# Altium PCB PCB1.PcbDoc (part 3 of 7)
Units mm, origin at the board's own origin, x right, y up, seen from the top; angles counter-clockwise.
Board outline 100 x 70 mm, 6 copper layers (Top Layer 1, GND_1, SIG, VCC, GND_2, Bottom Layer 1), stack 0.816 mm thick; 462 components, 328 nets, 2208 pads, 873 vias.
Unrouted connection lines stored in the file: 176.
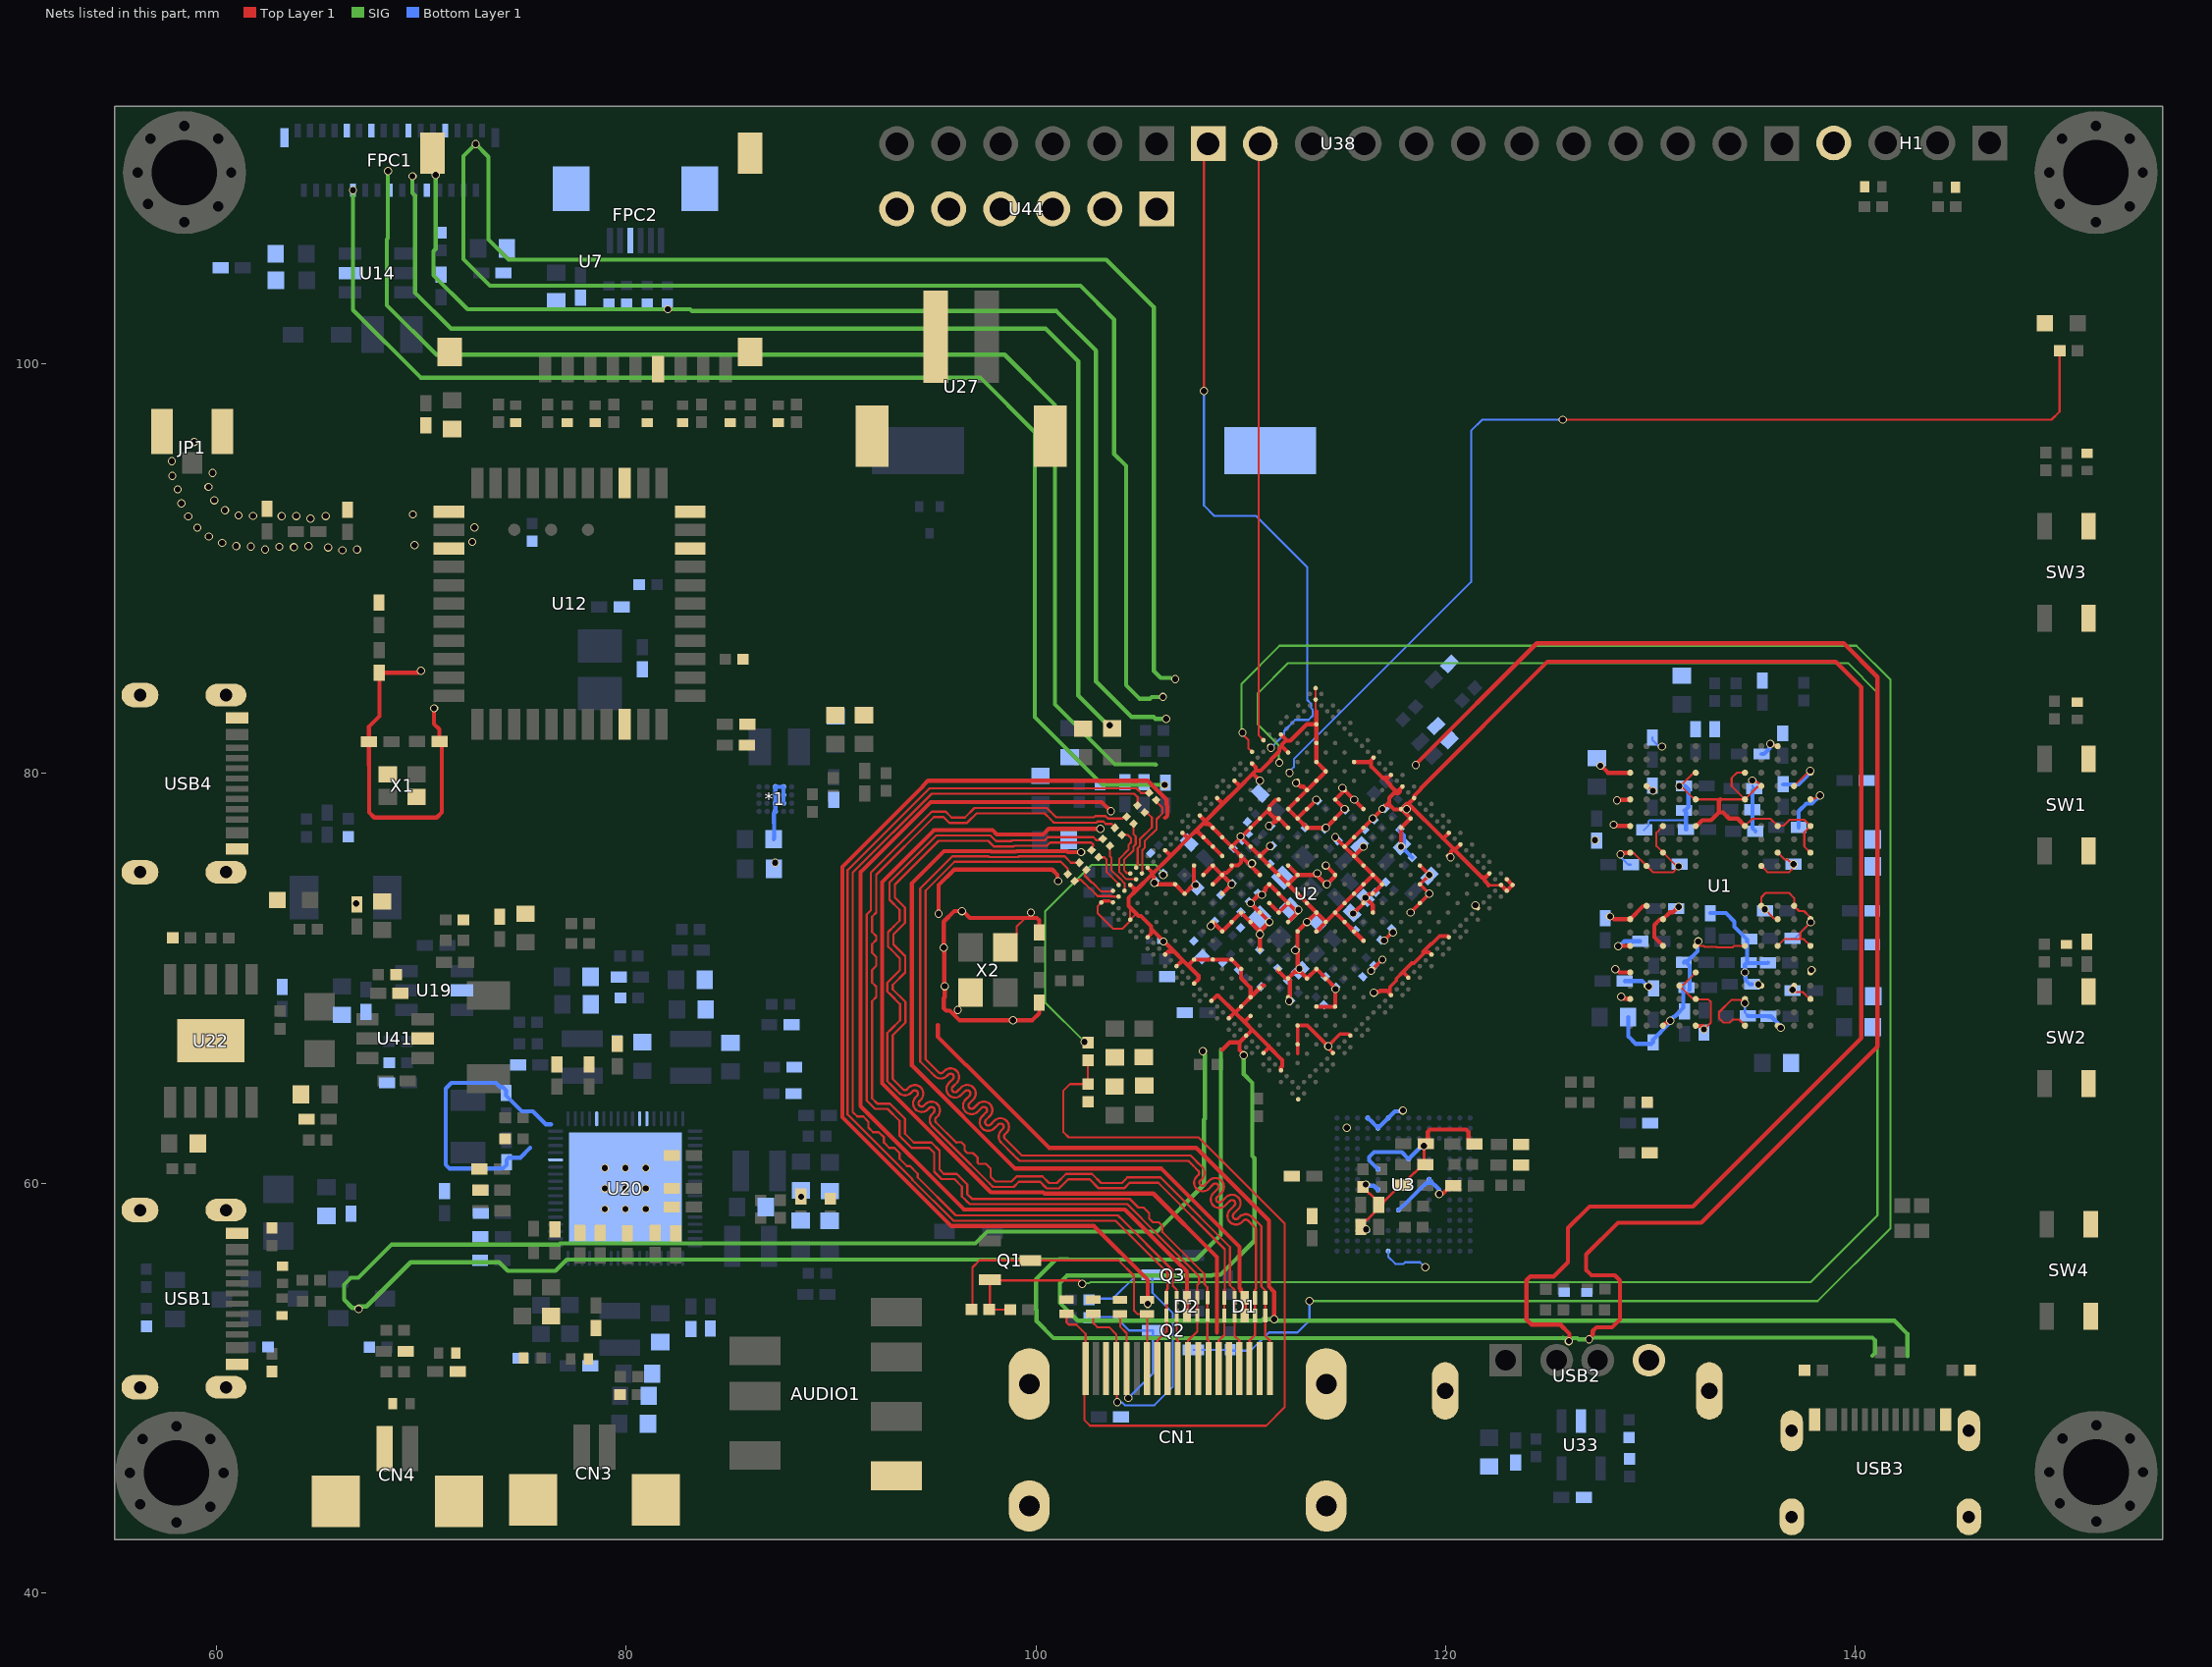
[diagram p7: the nets of this part, all layers, seen from the top]

## Via types
v1: diameter 0.4, hole 0.3, Top Layer 1 to Bottom Layer 1, tented both sides, 873 vias

## Nets (pads, with @x,y where several pads share a name; then routed paths per layer and width w, separated by ;. In a path a pad name is that pad's centre, name@x,y a point inside that pad or via, vN(x,y) a via of type N, cw(c..) or ccw(c..) an arc to the next point about the centre after c; other vN are vias at no path point) (continued)
GND: *1.B2 *1.B3 *1.B4 *1.C1 *1.C2 *1.C3 *1.C4 AUDIO1.1 BT1.2 C1.1 C2.1 C3.1 C4.1 C5.1 C6.1 C7.1 C8.1 C9.1 C10.1 C11.1 C12.1 C13.1 C14.1 C15.1 C16.1 C17.1 C18.1 C19.1 C20.1 C21.1 C22.1 C23.1 C24.1 C25.1 C26.1 C27.1 C28.1 C29.1 C30.1 C31.1 C32.1 C33.1 C34.1 C35.1 C36.1 C37.1 C38.1 C39.1 C40.1 C41.1 C42.1 C43.2 C44.2 C46.1 C47.1 C48.2 C49.1 C50.1 C51.1 C52.1 C53.1 C54.1 C55.1 C56.1 C57.1 C58.1 C59.1 C60.1 C61.1 C62.1 C65.1 C66.1 C67.1 C68.1 C69.1 C70.2 C71.2 C72.2 C74.2 C75.2 C76.2 C77.2 C78.1 C79.1 C80.1 C82.1 C83.2 C84.1 C85.1 C86.2 C87.1 C88.1 C90.2 C91.2 C92.1 C93.1 C94.2 C95.2 C96.2 C97.2 C98.1 C99.2 C100.1 C101.1 C102.2 C103.1 C104.1 C105.1 C106.1 C107.2 C108.2 C110.2 C111.2 C112.1 C113.1 C114.1 C115.1 C117.1 C118.1 C119.1 C120.1 C121.1 C122.1 C124.1 C125.1 C126.1 C127.1 C128.1 C129.1 C130.1 C131.1 C132.1 C133.1 C134.1 C135.1 C136.1 C137.1 C138.1 C139.1 C140.1 C141.1 C142.1 C143.1 C144.1 C145.1 C146.1 C147.1 C148.1 C149.1 C150.1 C151.1 C152.1 C153.1 C154.1 C155.1 C156.1 C157.1 C158.1 C159.1 C160.1 C161.1 C162.1 C163.1 C164.1 C165.1 C166.1 C167.1 C168.1 C169.1 C170.1 C171.1 C172.1 C173.2 C174.1 C179.1 C180.1 C181.1 C182.1 C183.1 C184.1 C185.1 C186.1 C187.1 C188.1 C189.1 C190.1 C191.1 C192.1 C193.1 C194.1 C195.1 C196.2 C197.2 C198.2 C199.2 C200.2 C201.2 C202.1 C203.1 C204.1 C205.1 C206.1 C207.1 C208.1 C209.1 C210.1 C211.1 C212.1 C213.1 C214.1 C215.1 C216.1 C217.1 C218.1 C219.1 C220.1 C221.1 C222.1 C223.1 C224.1 C225.1 C226.1 C227.1 C228.1 C229.1 C230.1 C231.1 C233.1 C234.1 C235.2 C236.2 C237.2 C238.2 C239.1 C242.1 C243.1 C244.1 C245.1 C246.1 C247.1 C248.2 C249.2 C250.1 C251.1 C252.1 C253.1 CN1.2 CN1.5 CN1.8 CN1.11 CN1.17 CN1.20 CN1.21 CN1.22 CN1.23 CN3.3 CN3.4 CN4.1 CN4.3 CN4.4 D1.3 D1.8 D2.3 D2.8 D3.2 D4.2 D5.2 D6.2 FPC1.9 FPC1.10 FPC1.13 FPC1.16 FPC1.19 FPC1.22 FPC1.25 FPC1.32 FPC2.3 FPC2.7 FPC2.8 H1.4 JP1.2 JP1.3 LED1.1 LED3.1 R11.2 R12.2 R13.2 R14.1 R30.1 R31.1 R32.1 R33.1 R38.1 R42.1 R43.1 R50.2 R53.1 R55.1 R66.2 R69.2 R72.1 R73.1 R74.1 R78.1 R82.1 R83.1 R84.2 R85.1 R89.1 R94.2 R112.1 R113.1 R116.1 R118.1 SW1.3 SW1.4 SW2.3 SW2.4 SW3.3 SW3.4 SW4.3 SW4.4 U1.A3 U1.A10 U1.AB3 U1.AB5 U1.AB8 U1.AB10 U1.C1 U1.C5 U1.C8 U1.C12 U1.D2 U1.D4 U1.D9 U1.D11 U1.E1 U1.E5 U1.E8 U1.E12 U1.G1 U1.G3 U1.G5 U1.G8 U1.G10 U1.G12 U1.J1 U1.J3 U1.J10 U1.J12 U1.K2 U1.K4 U1.K9 U1.K11 U1.N2 U1.N4 U1.N9 U1.N11 U1.P1 U1.P3 U1.P10 U1.P12 U1.T1 U1.T3 U1.T5 U1.T8 U1.T10 U1.T12 U1.V1 U1.V5 U1.V8 U1.V12 U1.W2 U1.W4 U1.W9 U1.W11 U1.Y1 U1.Y5 U1.Y8 U1.Y12 U2.1B10 U2.1B11 U2.1B15 U2.1B19 U2.1C4 U2.1C5 U2.1C6 U2.1C8 U2.1C9 U2.1C14 U2.1C16 U2.1C18 U2.1D1 U2.1D3 U2.1D4 U2.1D10 U2.1D14 U2.1E3 U2.1E8 U2.1E10 U2.1E14 U2.1E15 U2.1E17 U2.1F6 U2.1F7 U2.1F8 U2.1F9 U2.1F10 U2.1F15 U2.1F16 U2.1F20 U2.1G3 U2.1G6 U2.1G7 U2.1G8 U2.1G9 U2.1G10 U2.1G11 U2.1G12 U2.1G14 U2.1G16 U2.1G18 U2.1G19 U2.1G20 U2.1H1 U2.1H2 U2.1H6 U2.1H11 U2.1H12 U2.1H13 U2.1J1 U2.1J5 U2.1J6 U2.1J8 U2.1J9 U2.1J11 U2.1J12 U2.1J13 U2.1J16 U2.1J18 U2.1K2 U2.1K3 U2.1K4 U2.1K5 U2.1K6 U2.1K8 U2.1K9 U2.1K11 U2.1K12 U2.1K13 U2.1K14 U2.1K15 U2.1K18 U2.1L3 U2.1L6 U2.1L10 U2.1L11 U2.1L12 U2.1L13 U2.1L14 U2.1L15 U2.1L19 U2.1M3 U2.1M4 U2.1M5 U2.1M6 U2.1M10 U2.1M11 U2.1M12 U2.1M13 U2.1M14 U2.1M15 U2.1M16 U2.1M17 U2.1M20 U2.1N3 U2.1N4 U2.1N7 U2.1N11 U2.1N12 U2.1N17 U2.1P1 U2.1P5 U2.1P6 U2.1P7 U2.1P8 U2.1P10 U2.1P11 U2.1P12 U2.1P14 U2.1P15 U2.1R3 U2.1R4 U2.1R5 U2.1R6 U2.1R7 U2.1R8 U2.1R9 U2.1R11 U2.1R12 U2.1R13 U2.1R14 U2.1R15 U2.1T3 U2.1T5 U2.1T7 U2.1T8 U2.1T9 U2.1T10 U2.1T11 U2.1T12 U2.1T13 U2.1T14 U2.1T15 U2.1T16 U2.1T17 U2.1U2 U2.1U12 U2.1U13 U2.1U15 U2.1U17 U2.1V1 U2.1V4 U2.1V7 U2.1V12 U2.1V13 U2.1V18 U2.A1 U2.A2 U2.A38 U2.AA2 U2.AC37 U2.AD2 U2.AE37 U2.AH37 U2.AL37 U2.AP2 U2.AP8 U2.AP13 U2.AP16 U2.AP19 U2.AP22 U2.AP25 U2.AP28 U2.AP31 U2.AP34 U2.AP37 U2.AR1 U2.AR38 U2.B1 U2.B2 U2.B6 U2.B11 U2.B14 U2.B18 U2.B21 U2.B28 U2.B31 U2.D2 U2.E37 U2.H37 U2.J2 U2.L2 U2.L37 U2.P37 U2.U2 U2.U37 U2.W2 U2.Y37 U3.A6 U3.C4 U3.E7 U3.G5 U3.H10 U3.J5 U3.K8 U3.N2 U3.N5 U3.P4 U3.P6 U4.2 U5.2 U6.2 U7.6 U7.10 U7.11 U7.12 U7.13 U8.1 U9.1 U10.1 U11.1 U12.1 U12.3 U12.20 U12.31 U12.33 U12.36 U14.2 U15.1 U16.1 U17.1 U18.1 U19.2 U20.47 U20.56 U20.62 U20.63 U20.69 U22.11 U23.1 U24.1 U25.1 U26.1 U27.1 U27.3 U27.4 U29.1 U30.1 U31.2 U32.1 U33.2 U35.1 U36.1 U37.1 U41.2 U42.1 U43.1 U44.1 U44.2 U44.3 U44.4 U44.5 U44.6 USB1.1 USB1.12 USB1.13 USB1.14 USB2.4 USB2.5 USB2.6 USB3.1 USB3.12 USB3.13 USB3.14 USB4.1 USB4.12 USB4.13 USB4.14 X1.2 X1.4 X2.2 X2.4 | length 1267.7
  Top Layer 1 w0.102: v1(96.187,68.455) 96.187,68.536 96.264,68.613 96.264,68.756 X2.2@96.814,69.305 ; X2.4@98.514,71.505 99.063,72.054 99.063,72.52 99.497,72.954 ; U2.AR38@103.195,73.707 103.218,73.73 103.307,73.73 103.314,73.737 103.699,73.737 103.729,73.707 U2.AP37@103.761,73.707 ; 103.649,73.737 103.576,73.81 103.284,73.81 103.211,73.737 103.211,73.717 103.013,73.519 103.013,73.186 103.777,72.421 104.233,72.421 104.589,72.777 104.589,73.449 104.505,73.533 ; U2.AL37@104.61,72.858 104.61,72.86 104.902,73.152 ; U2.AR1@113.664,84.17 113.664,83.065 113.699,83.03 ; 122.103,74.524 122.119,74.54 122.701,74.54 U2.B2@122.715,74.554 ; U1.J1@129.018,76.132 129.051,76.099 129.212,76.099 U1.K2@129.824,75.487 130.127,75.184 131.121,75.184 U1.K4@131.424,75.487 ; U1.D2@129.824,79.387 129.863,79.387 130.094,79.156 v1(130.133,79.156) ; U1.G3@130.624,77.437 130.302,77.115 130.302,76.458 131.236,75.525 131.386,75.525 U1.K4@131.424,75.487 ; v1(131.385,75.465) 131.402,75.465 U1.K4@131.424,75.487 ; v1(131.424,79.387) U1.D4@131.463,79.387 ; U1.V5@132.224,70.287 132.224,70.275 131.617,69.668 131.455,69.668 U1.W4@131.424,69.637 131.762,69.298 131.773,69.298 132.047,69.025 132.186,69.025 U1.Y5@132.224,68.987 132.249,68.961 132.842,68.961 132.955,68.848 132.955,67.837 132.722,67.604 132.65,67.604 v1@132.634,67.62 ; U1.T5@132.224,71.587 U1.T5@132.348,71.587 ; U1.C5@132.224,80.037 132.186,79.999 132.075,79.999 U1.D4@131.463,79.387 ; v1(132.348,71.803) U1.T5@132.348,71.587 ; v1(134.623,68.788) 134.559,68.788 134.396,68.952 133.971,68.952 133.362,68.343 133.362,68.051 133.568,67.844 133.887,67.844 134.023,67.98 134.346,67.98 134.624,67.702 U1.AB8@134.624,67.687 ; U1.Y8@134.624,68.987 134.64,68.97 v1@134.64,68.819 ; U1.T8@134.624,71.587 134.095,71.587 134.025,71.516 133.241,71.516 133.231,71.526 132.665,71.526 132.605,71.587 U1.T5@132.348,71.587 ; U1.G8@134.624,77.437 134.968,77.781 135.879,77.781 U1.G10@136.224,77.437 136.246,77.459 136.526,77.459 136.806,77.739 137.521,77.739 U1.G12@137.824,77.437 137.521,77.134 137.521,76.439 U1.J12@137.824,76.137 ; U1.C8@134.624,80.037 134.228,80.037 133.978,79.786 133.978,79.383 U1.E8@134.624,78.737 ; v1(134.985,79.657) 135.042,79.6 135.211,79.6 U1.D9@135.424,79.387 135.386,79.349 135.236,79.349 U1.E8@134.624,78.737 ; U1.K9@135.424,75.487 135.726,75.184 136.779,75.184 136.906,75.311 136.906,75.316 136.991,75.4 v1(136.991,75.572) ; v1@135.596,73.454 135.509,73.454 U1.N9@135.426,73.537 ; v1(135.863,81.443) 135.943,81.443 136.012,81.375 136.186,81.375 U1.A10@136.224,81.337 ; U1.T10@136.224,71.587 136.549,71.912 137.33,71.912 ; U1.P10@136.224,72.887 136.186,72.925 136.044,72.925 135.602,73.367 135.595,73.367 U1.N9@135.426,73.537 ; U1.J10@136.224,76.137 136.562,75.798 136.712,75.798 U1.K11@136.965,75.546 ; v1(136.948,69.432) 137.045,69.334 137.44,69.334 137.787,68.987 U1.Y12@137.824,68.987 ; v1@136.961,69.398 136.987,69.425 136.987,69.566 137.024,69.603 U1.W11@137.024,69.637 ; U1.D11@137.024,79.387 137.636,79.999 137.732,79.999 137.746,80.012 137.746,80.037 U1.C12@137.824,80.037 ; U1.C12@137.782,80.037 137.807,80.062 v1(137.807,80.135) ; U1.P12@137.799,72.826 137.807,72.826 137.838,72.795 v1(137.838,72.734) 137.33,72.226 137.33,71.912 ; U1.V12@137.824,70.287 137.824,70.34 137.876,70.393 v1(137.876,70.409) ; U1.T12@137.824,71.587 137.499,71.912 137.33,71.912 ; U1.P12@137.824,72.887 137.786,72.925 137.786,73.01 137.511,73.285 137.275,73.285 U1.N11@137.024,73.537 137.024,73.923 136.779,74.168 135.636,74.168 135.424,73.956 U1.N9@135.424,73.537 U1.N9@135.426,73.537 ; U1.E12@137.824,78.737 137.862,78.775 138.057,78.775 138.207,78.925 v1(138.287,78.925) ; U1.D4@131.463,79.387 131.477,79.387 131.55,79.314 131.575,79.314 132.076,78.813 132.094,78.813 132.17,78.737 U1.E5@132.224,78.737 133.424,78.737 U1.E8@134.624,78.737
  Top Layer 1 w0.127: C166.1@115.86,57.847 115.86,57.972 116.066,58.178 116.146,58.178 116.97,59.002 C160.1@116.97,59.069 ; R66.2@115.968,59.808 115.968,59.795 116.271,59.492 116.302,59.492 116.519,59.276 116.763,59.276 C160.1@116.97,59.069 ; R66.2@115.978,59.797 v1(116.11,59.929) ; C161.1@119.016,61.812 118.956,61.751 118.956,60.96 C163.1@119.016,60.899 118.956,60.899 118.891,60.899 118.496,60.503 118.478,60.503 118.264,60.29 118.264,60.098 118.058,59.891 C165.1@117.933,59.891 117.726,59.685 117.585,59.685 C160.1@116.97,59.069
  Top Layer 1 w0.178: 112.78,66.316 112.78,67.695 112.782,67.697 113.254,67.697 v1(114.278,66.673) ; U2.B31@114.513,66.351 114.513,66.361 114.32,66.553 114.32,66.631 v1(114.278,66.673) ; U2.B28@115.358,67.202 115.346,67.202 115.273,67.275 114.845,67.275 114.278,66.708 v1(114.278,66.673) ; v1(116.371,70.36) 116.371,70.366 116.454,70.448 U2.1B11@116.454,70.454 116.911,70.912 v1(116.917,70.912) ; U2.1C9@116.913,71.833 116.921,71.841 117,71.841 v1(117.002,71.844) ; v1@117.02,71.861 117.365,72.206 117.365,72.273 U2.1C8@117.373,72.273 ; 117.255,69.278 117.293,69.316 117.293,69.582 117.608,69.897 117.608,69.991 117.923,70.306 ; U2.1C8@117.373,72.215 U2.1C8@117.373,72.293 117.383,72.293 v1(117.441,72.235) ; U2.B18@118.189,70.028 118.189,70.04 117.923,70.306 ; v1(118.296,73.21) v1(119.215,74.129) U2.1C4@119.211,74.131 118.755,74.589 v1(119.215,75.049) U2.1E3@118.755,75.508 ; 118.909,71.266 119.202,71.266 119.308,71.159 U2.B14@119.321,71.159 ; U2.B11@120.166,72.01 120.155,72.01 120.108,72.057 119.715,72.057 119.333,71.674 119.291,71.674 118.909,71.292 118.909,71.186 118.469,70.746 118.363,70.746 117.923,70.306
  Top Layer 1 w0.203: v1(69.967,85.022) 69.913,85.022 69.815,84.924 C46.1@67.928,84.924 67.945,84.907 67.945,82.804 67.435,82.294 C48.2@67.435,81.555 67.435,80.393 67.437,80.391 67.437,78.105 67.691,77.851 70.739,77.851 70.993,78.105 70.993,81.449 C51.1@70.872,81.57 70.872,82.163 70.612,82.423 v1(70.612,83.185) ; 95.208,67.72 95.208,67.143 96.567,65.784 96.584,65.784 100.645,61.722 107.823,61.722 111.379,58.166 111.379,54.941 111.633,54.687 v1(111.633,53.349) ; v1(95.25,73.152) 95.25,74.549 96.012,75.311 100.796,75.311 101.054,75.053 101.054,74.787 v1(101.092,74.749) ; 95.993,68.227 96.187,68.422 v1(96.187,68.455) ; v1(98.885,67.945) 96.275,67.945 95.798,68.422 95.623,68.422 95.504,68.541 95.504,69.024 95.554,69.074 v1(95.554,69.61) 95.529,69.635 95.529,71.476 v1(95.504,71.501) 95.504,72.771 96.012,73.279 96.446,73.279 96.771,72.954 99.497,72.954 100.045,72.954 100.164,72.835 C62.1@100.164,72.247 ; v1@98.885,67.954 99.831,67.954 100.164,68.287 C61.1@100.164,68.819 ; 99.754,72.954 v1(99.754,73.211) ; v1(102.207,76.158) 101.567,76.158 101.513,76.211 99.055,76.211 99.027,76.183 97.834,76.183 97.806,76.211 95.515,76.211 93.946,74.642 93.946,65.742 98.982,60.706 106.125,60.706 109.946,56.886 109.946,54.874 110.005,54.815 110.005,54.728 110.201,54.531 D1.3@110.201,53.533 ; v1(103.148,77.298) 100.626,77.298 100.357,77.029 98.088,77.029 97.884,77.232 95.027,77.232 92.487,74.693 92.487,64.869 97.805,59.552 100.358,59.552 100.427,59.483 101.238,59.483 101.243,59.488 105.739,59.488 108.839,56.388 108.839,52.705 ; v1(103.663,78.16) 103.212,78.611 94.867,78.611 91.44,75.184 91.44,63.754 96.489,58.705 104.347,58.705 107.378,55.673 D2.3@107.378,53.541 ; U2.AP34@104.613,74.554 104.617,74.554 104.872,74.299 104.898,74.299 ; v1(105.458,54.101) 105.458,54.261 D6.2@105.419,54.3 105.462,54.343 105.462,55.273 102.834,57.901 95.872,57.901 90.551,63.221 90.551,75.437 94.479,79.365 94.479,79.397 94.729,79.647 105.46,79.647 106.382,78.725 106.382,78.487 106.425,78.444 106.425,77.942 106.318,77.834 ; U2.AH37@105.458,72.01 105.458,72.014 105.632,72.189 105.632,72.422 ; U2.AP31@105.462,75.402 105.462,75.398 105.66,75.199 105.66,75.061 ; v1@106.232,71.785 106.269,71.785 106.743,71.31 ; v1(106.232,71.8) 106.232,71.822 105.632,72.422 ; U2.AE37@106.31,71.16 106.315,71.16 106.465,71.31 106.743,71.31 ; U2.AP28@106.31,76.251 106.312,76.251 106.581,75.982 ; U2.AC37@106.876,70.594 106.88,70.594 107.152,70.866 107.188,70.866 ; U2.AP25@107.159,77.099 107.163,77.099 107.36,76.903 107.501,76.903 ; 107.392,70.675 107.941,70.126 107.941,69.958 107.739,69.756 107.734,69.756 U2.Y37@107.724,69.746 ; U2.1U15@107.721,75.51 107.721,74.592 U2.1T16@107.724,74.589 ; v1(107.797,74.553) 107.761,74.589 U2.1T16@107.724,74.589 ; U2.AP22@108.007,77.948 108.007,77.943 108.275,77.676 ; U2.1T15@108.184,75.049 108.184,75.054 108.638,75.508 108.643,75.508 108.643,75.502 108.748,75.398 108.748,75.394 109.088,75.054 109.098,75.054 109.1,75.051 U2.1R14@109.103,75.049 ; v1(108.538,72.557) 108.576,72.594 108.576,72.684 108.64,72.748 U2.1N17@108.64,72.752 109.101,72.291 109.103,72.291 110.022,73.21 U2.1K15@110.941,72.291 ; U2.U37@108.573,68.897 108.577,68.897 108.838,69.158 108.896,69.158 109.716,68.338 ; U2.1R15@108.643,74.589 U2.1R14@109.103,75.049 ; U2.AP19@108.856,78.796 108.856,78.792 109.095,78.553 109.095,78.496 ; 109.093,66.499 109.468,66.874 109.944,66.874 ; U2.1P15@109.103,74.129 v1(109.563,74.589) 109.56,74.592 U2.1R14@109.103,75.049 ; U2.1R14@109.103,75.049 109.212,75.158 109.318,75.158 109.556,75.396 109.556,75.502 U2.1R13@109.561,75.507 ; U2.1T13@109.103,75.968 107.914,77.157 107.755,77.157 ; U2.P37@109.421,68.048 109.426,68.048 109.704,68.326 ; U2.1R13@109.559,75.51 109.872,75.51 110.019,75.657 U2.1R12@110.019,75.97 ; U2.AP16@109.704,79.645 109.704,79.64 109.914,79.43 109.914,79.316 ; 109.728,68.326 110.172,67.882 ; 109.735,68.326 110.942,69.533 110.946,69.533 111.066,69.653 111.123,69.653 111.133,69.663 ; v1(110.153,66.24) 110.153,66.293 109.944,66.503 109.944,66.874 ; U2.1F20@110.478,68.154 110.205,67.882 110.172,67.882 ; U2.1P12@110.477,75.516 110.474,75.516 110.022,75.968 U2.1T12@109.563,76.427 ; U2.1G19@110.479,69.075 110.479,69.552 110.019,70.011 110.019,70.449 110.022,70.452 109.563,70.912 107.72,70.912 107.483,70.675 107.379,70.675 107.188,70.866 ; v1(110.549,75.612) 110.539,75.603 110.539,75.575 110.478,75.515 U2.1P12@110.478,75.51 U2.1N12@110.94,75.049 ; U2.AP13@110.553,80.493 110.553,80.489 110.74,80.302 110.74,80.141 ; U2.1J16@110.938,71.373 110.942,71.377 110.938,71.38 110.938,72.288 v1(111.401,72.751) v1(110.482,73.67) 110.482,73.675 U2.1M13@110.938,74.131 110.943,74.131 110.999,74.075 v1(111.031,74.075) ; v1(110.942,79.645) 110.636,79.951 110.549,79.951 ; v1@111.034,74.077 111.034,74.131 111.208,74.304 111.208,74.396 111.4,74.589 U2.1K12@112.32,73.67 ; U2.H37@111.118,66.351 111.118,66.356 111.379,66.616 111.379,66.675 110.617,67.437 ; 111.379,66.658 112.033,66.004 112.033,65.697 111.967,65.63 111.967,65.512 U2.E37@111.962,65.508 ; v1(111.384,77.44) 111.384,77.362 U2.1R9@111.398,77.349 ; U2.1L13@111.401,73.67 111.861,73.21 U2.1K12@112.32,73.67 ; U2.1P10@111.401,76.428 U2.1P11@110.941,75.968 ; U2.1T8@111.401,78.266 U2.1T11@110.022,76.887 ; v1@111.473,77.44 111.473,77.475 111.654,77.656 111.71,77.656 111.854,77.8 U2.1R8@111.86,77.806 ; U2.1G16@111.816,70.374 111.816,70.413 U2.1G16@111.857,70.454 ; U2.1G16@111.84,70.35 112.192,69.998 112.315,69.998 U2.1F16@112.318,69.995 ; U2.1T7@111.859,78.724 111.731,78.724 111.401,78.395 111.401,78.266 111.401,78.068 111.641,77.828 111.833,77.828 111.855,77.806 U2.1R8@111.861,77.806 ; U2.AP8@111.967,81.908 111.967,81.903 112.2,81.669 112.2,81.602 ; U2.1P8@112.318,77.349 U2.1R8@111.861,77.806 ; U2.1J13@112.321,72.751 112.553,72.984 112.773,73.203 112.773,73.211 112.775,73.212 U2.1J12@112.777,73.212 112.698,73.291 112.32,73.668 U2.1K12@112.32,73.67 ; U2.1M10@112.321,75.508 U2.1L10@112.78,75.049 ; U2.1V4@112.321,81.024 112.01,81.334 ; v1(112.37,68.883) 112.37,68.936 112.32,68.986 112.32,69.072 U2.1E17@112.317,69.075 112.317,69.08 112.401,69.164 112.401,69.906 112.317,69.99 U2.1F16@112.317,69.995 ; v1(112.662,71.366) 112.666,71.37 112.772,71.37 U2.1G14@112.777,71.366 ; U2.1J12@112.734,73.255 v1(112.821,73.342) ; U2.1T5@112.777,79.647 112.777,79.642 112.697,79.562 v1(112.697,79.538) 112.75,79.538 112.93,79.358 113.068,79.358 U2.1R5@113.24,79.185 ; U2.1F15@112.78,70.525 112.81,70.525 v1(112.868,70.468) ; U2.1F15@112.78,70.564 112.78,70.457 112.773,70.451 112.773,70.325 v1@112.771,70.323 ; v1@112.78,70.565 112.819,70.603 112.793,70.603 112.78,70.616 112.78,71.366 U2.1G14@112.777,71.366 ; U2.1C16@113.699,68.614 114.619,68.614 114.618,68.824 114.621,68.827 114.621,69.524 114.615,69.53 U2.1C14@114.615,69.535 114.159,69.991 114.159,69.993 113.699,70.452 113.24,69.993 113.238,69.993 112.908,70.323 v1@112.771,70.323 ; U2.1G12@113.699,72.291 U2.1G11@114.159,72.75 ; v1(113.699,78.726) U2.1P7@112.78,77.806 ; 113.699,83.03 U2.1V1@113.699,82.404 ; U2.1K9@113.701,75.047 113.701,75.045 U2.1J9@114.156,74.591 ; v1(113.74,75.129) 113.696,75.084 U2.1K9@113.696,75.051 112.782,75.051 U2.1L11@112.32,74.589 ; v1(114.159,75.508) 114.615,75.052 U2.1J8@114.615,75.05 114.612,75.047 114.612,74.999 114.27,74.657 114.245,74.657 114.236,74.666 114.231,74.666 U2.1J9@114.156,74.591 ; v1(114.205,74.593) 114.204,74.591 U2.1J9@114.156,74.591 ; v1(114.619,76.887) U2.1K6@115.078,76.428 ; U2.1C14@114.621,69.475 v1(114.635,69.475) ; v1(114.966,79.301) 114.966,79.298 115.075,79.19 U2.1N3@115.075,79.187 ; U2.1F9@115.538,73.21 116.001,73.673 116.001,73.839 v1(116.091,73.93) ; U2.1P1@115.538,80.564 116.285,80.564 116.37,80.649 ; U2.1L3@115.994,78.268 v1(115.538,78.726) v1(115.538,78.726) 115.076,79.187 U2.1N3@115.075,79.187 ; U2.1D10@115.998,71.831 U2.1G10@114.619,73.21 ; v1(115.998,76.427) U2.1J6@115.538,75.968 ; U2.1E8@116.454,73.212 116.454,73.567 v1(116.091,73.93) ; U2.AD2@116.492,80.776 116.492,80.772 116.37,80.649 ; v1(116.503,69.299) 116.541,69.336 116.75,69.336 116.807,69.392 117.141,69.392 117.334,69.199 117.334,69.185 U2.B21@117.338,69.181 ; U2.AA2@117.336,79.928 117.331,79.928 117.2,79.797 116.964,79.797 ; 117.672,79.046 117.318,79.4 117.318,79.443 116.964,79.797 ; v1(117.836,76.427) 117.836,77.346 117.869,77.379 118.296,77.806 117.836,78.266 117.839,78.266 117.84,78.264 118.092,78.264 v1(118.102,78.254) ; U2.1J1@117.846,78.256 117.83,78.24 117.496,78.24 117.26,78.476 117.26,78.61 ; U2.1J1@117.855,78.264 118.112,78.521 118.197,78.521 ; U2.W2@117.902,79.362 117.902,79.358 117.773,79.23 117.773,79.123 117.697,79.046 117.496,79.046 117.26,78.81 117.26,78.61 ; v1(118.55,80.409) 118.55,80.45 124.46,86.36 139.446,86.36 141.097,84.709 141.097,66.675 140.208,65.786 132.486,58.064 128.422,58.064 126.873,56.515 126.873,55.753 127.127,55.499 128.27,55.499 128.524,55.245 128.524,53.34 128.143,52.959 127.379,52.959 127.194,52.774 127.194,52.6 127.013,52.419 v1(127.013,52.366) ; v1(118.946,61.812) 119.034,61.9 C161.1@119.034,61.917 119.134,62.018 119.134,62.492 119.253,62.611 121.004,62.611 121.123,62.492 121.123,62.079 121.291,61.91 C167.1@121.416,61.91 ; v1(119.696,59.464) 119.706,59.474 119.865,59.474 120.268,59.876 C162.1@120.393,59.876 ; U2.1D1@120.131,75.97 120.131,75.974 120.277,76.121 120.277,76.208 120.393,76.324 ; U2.1D1@120.136,75.975 120.136,75.969 120.16,75.944 120.217,75.944 v1(120.254,75.907) ; U2.L2@120.165,77.099 119.898,76.832 119.885,76.832 ; U2.J2@120.73,76.534 120.521,76.324 120.393,76.324 ; v1(121.461,73.566) 121.461,73.547 121.58,73.429 U2.B6@121.58,73.424 ; 122.103,74.524 122.103,74.578 121.902,74.779 121.902,74.816 121.79,74.927 ; U2.D2@122.145,75.119 121.953,74.927 121.79,74.927 ; U2.B2@122.715,74.554 122.998,74.271 123.281,74.554 U2.B1@122.998,74.837 ; v1(126.023,52.279) 126.049,52.305 126.049,52.647 125.611,53.086 124.206,53.086 123.952,53.34 123.952,55.245 124.142,55.435 125.285,55.435 125.984,56.134 125.984,57.807 127.034,58.857 132.079,58.857 140.305,67.083 140.305,84.218 139.061,85.462 124.981,85.462 118.786,79.267 118.786,79.232 118.476,78.922 118.476,78.799 118.197,78.521 ; v1(127.567,80.379) 127.597,80.379 127.939,80.037 U1.C1@129.024,80.037 ; v1(128.038,73.023) 128.091,73.023 128.233,72.882 128.633,72.882 128.637,72.887 U1.P1@129.024,72.887 129.655,73.518 129.805,73.518 U1.N2@129.824,73.537 ; v1(128.211,77.505) 128.264,77.505 128.333,77.437 128.979,77.437 128.988,77.428 U1.G1@129.015,77.428 ; v1(128.29,70.437) 128.343,70.437 128.494,70.287 U1.V1@129.024,70.287 ; v1(128.376,78.692) 128.402,78.718 129.005,78.718 U1.E1@129.024,78.737 ; v1(128.443,71.571) 128.451,71.579 129.016,71.579 U1.T1@129.024,71.587 ; v1(128.548,76.056) 128.601,76.056 128.663,76.118 129.005,76.118 U1.J1@129.018,76.132 ; v1(128.587,69.098) 128.64,69.098 128.733,69.005 129.005,69.005 U1.Y1@129.024,68.987 ; U1.AB3@130.624,67.687 130.65,67.687 130.85,67.887 130.943,67.887 v1(130.981,67.925) ; U1.T3@130.624,71.587 130.195,72.015 130.195,72.602 130.462,72.868 130.605,72.868 130.955,73.218 131.099,73.218 131.417,73.537 U1.N4@131.424,73.537 131.424,73.531 v1(131.382,73.489) ; U1.AB5@132.224,67.687 132.242,67.668 132.593,67.668 132.634,67.627 132.634,67.516 v1(132.625,67.506) ; U1.G5@132.224,77.437 132.25,77.437 132.537,77.724 132.969,77.724 133.35,78.105 ; 133.424,78.737 133.35,78.663 133.35,78.105 ; U1.G8@134.624,77.437 134.26,77.801 133.858,77.801 133.553,78.105 133.35,78.105 ; 104.898,74.299 104.521,73.922 104.521,73.533 104.902,73.152 105.006,73.048 105.128,73.048 105.632,72.544 105.632,72.422 ; 104.898,74.299 105.66,75.061 ; 105.66,75.061 105.745,74.976 105.745,74.697 v1(105.783,74.66) 105.809,74.66 105.878,74.591 106.803,74.591 107.265,74.129 U2.1T16@107.724,74.589 ; 105.66,75.061 106.581,75.982 ; 106.581,75.982 107.501,76.903 ; 106.743,71.31 107.188,70.866 ; 107.501,76.903 107.755,77.157 ; 107.755,77.157 108.275,77.676 ; 108.275,77.676 109.095,78.496 ; 108.275,77.676 108.294,77.656 108.294,77.538 108.453,77.538 U2.1T12@109.563,76.427 ; 109.095,78.496 109.914,79.316 ; U2.1T12@109.563,76.427 U2.1T11@110.022,76.887 ; 109.914,79.316 110.549,79.951 ; 109.944,66.874 110.27,67.2 110.274,67.2 110.512,67.437 110.617,67.437 ; U2.1T11@110.022,76.887 U2.1P11@110.941,75.968 ; 110.172,67.882 110.617,67.437 ; 110.549,79.951 110.74,80.141 ; 110.74,80.141 110.976,80.141 111.485,80.65 111.485,80.695 111.64,80.85 111.646,80.85 111.882,81.086 111.882,81.207 112.01,81.334 ; U2.1P11@110.941,75.968 U2.1L11@112.32,74.589 ; 112.01,81.334 112.01,81.411 112.2,81.602 ; 112.2,81.602 112.427,81.602 113.23,82.404 U2.1V1@113.696,82.404 U2.1V1@113.699,82.404 ; U2.1F16@112.317,69.995 112.645,70.323 v1@112.771,70.323 ; U2.1L11@112.32,74.589 U2.1H11@113.696,73.212 U2.1H11@113.699,73.21 ; U2.1G14@112.777,71.366 112.777,72.287 v1(113.24,72.75) U2.1H11@113.699,73.21 ; U2.1P7@112.78,77.806 112.321,78.266 114.159,80.105 113.699,80.564 U2.1V1@113.699,82.404 ; U2.1P7@112.78,77.806 113.24,77.347 v1(114.159,77.347) v1(115.078,78.266) U2.1M4@115.075,78.268 114.619,78.726 114.619,78.731 U2.1N3@115.075,79.187 ; U2.1H11@113.699,73.21 U2.1G11@114.159,72.75 ; U2.1G11@114.159,72.75 U2.1G10@114.619,73.21 ; U2.1G10@114.619,73.21 U2.1G6@116.457,75.049 ; U2.1K6@115.078,76.428 117.26,78.61 ; U2.1K6@115.078,76.428 U2.1J6@115.538,75.968 ; U2.1J6@115.538,75.968 U2.1G6@116.457,75.049 ; v1(116.091,73.93) 116.288,74.126 116.454,74.126 116.917,74.589 U2.1G6@116.457,75.049 ; 116.37,80.649 116.37,80.348 116.921,79.797 116.964,79.797 ; 118.197,78.521 119.885,76.832 ; 119.885,76.832 120.393,76.324 ; 120.393,76.324 120.457,76.26 121.79,74.927
  SIG w0.203: v1@66.654,108.468 66.654,102.637 69.958,99.334 97.284,99.334 99.949,96.669 99.949,82.749 103.258,79.44 v1(106.284,79.44) ; v1(66.927,53.848) 66.87,53.905 66.618,53.905 66.214,54.309 66.214,55.038 66.548,55.372 66.914,55.372 68.541,56.999 76.718,56.999 76.767,57.048 97.043,57.048 97.626,57.632 105.92,57.632 108.209,59.921 108.209,63.096 108.255,63.142 108.255,66.285 108.152,66.388 v1(108.152,66.441) ; v1@66.929,53.975 67.31,53.975 69.469,56.134 73.787,56.134 74.212,55.709 76.537,55.709 77.092,56.264 101.119,56.264 ; v1(68.362,109.422) 68.356,109.416 68.356,106.138 68.311,106.093 68.311,102.869 70.723,100.457 98.472,100.457 100.926,98.003 100.926,83.381 103.86,80.447 105.794,80.447 105.806,80.435 105.842,80.435 105.852,80.426 ; v1(69.556,109.168) 69.556,108.357 69.679,108.234 69.679,103.489 71.44,101.727 100.476,101.727 102.067,100.136 102.067,83.801 103.409,82.458 103.458,82.458 103.556,82.36 v1(103.609,82.36) ; v1(70.689,109.225) 70.689,105.616 70.584,105.511 70.584,104.335 72.248,102.671 v1(82.033,102.671) 83.118,102.671 83.205,102.585 100.996,102.585 102.936,100.645 102.936,84.492 104.665,82.763 105.748,82.763 105.838,82.673 v1(106.354,82.673) ; 100.92,56.216 100.029,55.325 100.029,55.307 100.006,55.284 100.006,53.815 100.029,53.792 100.029,53.26 100.86,52.429 125.73,52.429 ; 101.13,56.275 101.562,56.275 101.573,56.264 107.826,56.264 109.039,57.477 109.039,66.508 ; v1(106.207,83.739) 105.658,83.739 105.566,83.647 105.071,83.647 104.4,84.317 104.4,95.022 103.82,95.602 103.82,102.174 102.174,103.82 73.345,103.82 72.05,105.115 72.05,110.15 v1(72.644,110.744) 73.269,110.119 73.269,106.076 74.251,105.095 103.439,105.095 105.758,102.776 105.758,85.009 106.096,84.671 106.592,84.671 106.622,84.641 106.769,84.641 v1(106.807,84.604) ; v1(110.153,66.24) 110.153,65.313 110.568,64.898 110.568,61.321 110.672,61.217 110.672,57.183 109.014,55.525 108.639,55.525 108.593,55.479 101.521,55.479 101.167,55.126 101.167,54.154 102.045,53.276 111.027,53.276 111.1,53.349 v1(111.633,53.349) ; v1@111.633,53.276 141.923,53.276 142.553,52.646 142.553,51.543 ; 125.742,52.44 125.753,52.429 v1@125.986,52.429 ; v1(126.023,52.279) 125.986,52.317 v1@125.986,52.429 ; v1(127.013,52.366) 126.504,52.366 126.441,52.429 v1@125.986,52.429 ; v1@127.052,52.454 140.84,52.454 140.97,52.324 140.97,51.689 140.843,51.562
  Bottom Layer 1 w0.102: v1(115.18,62.703) U3.N2@115.204,62.679 ; U3.A6@117.204,56.679 117.208,56.675 117.208,56.401 117.557,56.052 117.95,56.052 118.032,56.134 118.757,56.134 118.995,55.896 v1(119.018,55.896) ; v1(128.548,76.056) 128.605,75.999 128.605,75.875 128.928,75.551 C8.1@129.053,75.551 ; C152.1@129.697,77.246 129.702,77.246 129.921,77.465 129.921,77.664 129.981,77.724 131.707,77.724 131.743,77.688 ; C26.1@130.105,81.763 130.105,81.638 130.368,81.375 130.511,81.375 v1(130.568,81.318) ; v1(134.623,68.788) 134.623,68.318 C37.1@134.771,68.17 ; v1(134.985,79.657) 134.985,79.345 C27.1@135.072,79.259 ; C156.1@136.94,71.948 137.065,71.948 137.838,72.722 v1(137.838,72.734)
  Bottom Layer 1 w0.203: 75.311,61.722 74.824,61.235 74.247,61.235 74.149,61.137 C249.2@74.149,61.012 74.149,60.887 73.981,60.719 73.856,60.719 73.843,60.706 71.374,60.706 71.183,60.897 71.183,64.621 71.459,64.897 73.632,64.897 73.839,64.69 73.964,64.69 74.132,64.522 C248.2@74.132,64.397 74.132,64.272 74.904,63.5 75.438,63.5 76.073,62.865 76.327,62.865 ; C121.1@87.197,76.794 87.223,76.819 87.223,77.573 87.211,77.585 87.211,78.068 87.276,78.133 *1.C2@87.276,78.549 *1.C3@87.276,78.949 *1.C4@87.276,79.349 *1.B4@87.676,79.349 *1.B3@87.676,78.949 *1.B2@87.676,78.549 ; v1(116.11,59.929) 116.167,59.872 116.498,59.872 116.691,59.679 U3.G5@116.704,59.679 ; U3.P4@116.204,63.179 116.217,63.179 116.323,63.073 116.332,63.073 116.638,62.767 116.647,62.777 U3.N5@116.704,62.777 ; U3.J5@116.704,60.679 116.276,61.106 116.276,61.275 116.509,61.507 117.863,61.507 118.192,61.179 U3.K8@118.204,61.179 118.827,61.802 118.936,61.802 v1(118.946,61.812) ; U3.N5@116.704,62.7 116.71,62.694 116.719,62.694 U3.P6@117.204,63.179 ; U3.P6@117.219,63.164 117.219,63.194 117.533,63.508 117.885,63.508 v1(117.922,63.545) ; U3.E7@117.704,58.679 117.717,58.679 117.909,58.871 117.932,58.871 118.796,59.735 119.068,60.007 119.34,60.007 ; C234.1@117.784,77.277 117.769,77.262 117.769,77.176 117.969,76.976 117.969,76.561 v1(117.836,76.427) 117.85,76.427 C187.1@118.38,75.897 ; U3.H10@119.204,60.179 119.686,59.697 119.686,59.474 v1(119.696,59.464) ; v1(128.443,71.571) 128.496,71.571 128.738,71.812 C155.1@129.509,71.812 ; C151.1@128.758,69.873 129.607,69.873 129.875,69.604 v1(129.928,69.604) ; C22.1@128.924,68.105 128.924,67.164 129.286,66.802 130.059,66.802 C34.1@130.137,66.881 130.137,67.006 130.943,67.812 v1@130.943,67.887 ; v1@130.943,67.986 130.981,68.024 131.034,68.024 131.146,68.135 131.202,68.135 131.257,68.191 131.268,68.191 131.443,68.366 131.443,68.389 131.612,68.558 C39.1@131.612,69.545 ; C39.1@131.598,69.65 C39.1@131.642,69.694 ; C5.1@131.638,70.773 131.695,70.831 131.82,70.831 132.311,71.321 132.311,71.765 v1(132.348,71.803) ; C36.1@131.654,79.396 131.696,79.396 131.864,79.227 131.864,78.362 131.696,78.194 C20.1@131.66,78.194 131.743,78.111 131.743,77.688 C14.1@131.743,77.266 ; C5.1@131.74,70.786 131.921,70.605 131.921,69.449 C39.1@131.899,69.427 ; C11.1@132.935,73.187 133.696,73.187 134.112,72.771 134.112,72.513 134.729,71.896 134.729,70.778 C17.1@134.696,70.746 ; C37.1@134.771,68.17 134.784,68.157 135.754,68.157 C29.1@135.768,68.144 135.893,68.144 136.331,67.705 136.331,67.62 v1(136.369,67.582) ; C28.1@134.97,69.712 134.845,69.712 134.677,69.881 134.677,69.967 134.644,70 134.644,70.266 v1(134.624,70.287) 134.624,70.673 C17.1@134.696,70.746 ; C27.1@135.072,79.259 134.993,79.18 C19.1@134.993,78.23 134.993,77.326 C18.1@135.136,77.183 ; C38.1@135.435,80.956 135.56,80.956 135.823,81.22 135.823,81.351 135.863,81.39 v1(135.863,81.443) ; C42.1@135.749,70.754 135.741,70.746 C17.1@134.696,70.746 ; C33.1@136.495,79.471 137.253,79.471 137.684,79.902 137.684,79.958 137.807,80.082 v1(137.807,80.135) ; C153.1@137.247,77.376 137.247,78.16 137.624,78.538 137.9,78.538 v1(138.287,78.925)
  other v1: 116.127,57.732 78.952,58.734 79.952,58.734 80.952,58.734 88.532,59.332 78.952,59.734 79.952,59.734 80.952,59.734 78.952,60.734 79.952,60.734 80.952,60.734 135.279,69.7 110.938,72.147 115.49,73.163 96.393,73.279 135.598,73.367 66.802,73.66 87.264,75.646 111.438,76.456 127.305,76.753 109.994,76.925 116.453,77.797 116.917,78.266 66.137,90.906 62.359,90.941 66.847,90.943 65.439,91.042 63.059,91.069 63.77,91.051 61.661,91.077 60.951,91.103 64.479,91.106 69.661,91.15 60.258,91.262 72.476,91.309 59.618,91.573 59.053,92.005 72.582,92.012 64.582,92.451 58.603,92.556 61.776,92.579 63.171,92.571 63.882,92.575 65.317,92.575 61.066,92.606 69.579,92.652 60.399,92.855 58.278,93.189 59.883,93.344 58.093,93.875 59.599,93.995 57.831,94.537 59.793,94.679 57.809,95.248 58.903,96.195 66.654,108.492
GPIO3_A1: R117.1 U2.1U5 | length 52.5
  Top Layer 1 w0.102: v1(125.73,97.282) 149.592,97.282 149.987,97.677 149.987,100.624 R117.1@150.005,100.642
  Bottom Layer 1 w0.102: v1(112.391,80.034) 112.391,80.114 112.598,80.321 112.598,80.703 121.252,89.357 121.252,96.741 121.793,97.282 v1(125.73,97.282)
GPIO3_A2: U2.AR10 U38.2 | length 29.3
  Top Layer 1 w0.102: U38.2@110.958,110.761 110.871,110.674 110.871,81.872 U2.AR10@111.118,81.625
GPIO3_A3: U2.AP10 U38.1 | length 34.2
  Top Layer 1 w0.102: v1(108.204,98.679) 108.204,110.547 U38.1@108.418,110.761
  Bottom Layer 1 w0.102: v1(108.204,98.679) 108.204,93.091 108.712,92.583 110.744,92.583 113.254,90.073 113.254,83.591 113.435,83.41 113.435,83.199 113.516,83.118 113.516,82.826 113.31,82.62 112.665,82.62 112.125,82.08 112.125,81.899 v1(111.479,81.253)
H0_N: R27.2 U2.AR33 | length 2.9
  Top Layer 1 w0.102: U2.AR33@104.613,75.119 104.604,75.129 104.454,75.129 104.304,75.279 104.304,75.783 104.764,76.243 104.764,76.433 104.877,76.546 104.877,76.93 104.774,77.032 104.774,77.127 R27.2@104.774,77.549
H0_P: R26.2 U2.AP33 | length 3.4
  Top Layer 1 w0.102: R26.2@104.199,77.005 104.478,77.005 104.648,76.835 104.648,76.64 104.535,76.528 104.535,76.302 104.075,75.841 104.075,75.184 104.423,74.837 U2.AP33@104.896,74.837
H1_N: R25.2 U2.AP35 | length 2.5
  Top Layer 1 w0.102: R25.2@103.61,76.461 103.61,75.968 103.683,75.895 103.683,75.284 104.119,74.847 104.126,74.847 104.33,74.642 U2.AP35@104.33,74.271
H1_P: R24.2 U2.AR35 | length 1.9
  Top Layer 1 w0.102: R24.2@103.059,75.911 103.344,75.911 103.454,75.801 103.454,75.189 103.988,74.655 103.988,74.645 104.047,74.586 U2.AR35@104.047,74.554
H2_N: R23.2 U2.AR36 | length 2
  Top Layer 1 w0.102: R23.2@102.462,75.303 102.462,75.162 102.394,75.094 102.394,75.01 102.73,74.674 102.756,74.674 103.18,74.25 103.744,74.25 U2.AR36@103.764,74.271
H2_P: R22-R29.2 U2.AP36 | length 2.5
  Top Layer 1 w0.102: R22-R29.2@101.895,74.747 102.036,74.747 102.104,74.815 102.188,74.815 102.613,74.391 102.639,74.391 103.017,74.013 103.66,74.013 103.684,73.99 104.035,73.99 U2.AP36@104.042,73.983
HC_N: R29.2 U2.AP32 | length 4.1
  Top Layer 1 w0.102: U2.AP32@105.179,75.119 105.196,75.136 105.196,76.254 105.308,76.367 105.308,76.693 105.893,77.277 105.893,77.768 106.171,78.047 106.171,78.339 105.88,78.63 R29.2@105.88,78.711
HC_P: R28.2 U2.AR32 | length 3.2
  Top Layer 1 w0.102: U2.AR32@104.896,75.402 104.896,75.44 104.967,75.511 104.967,76.349 105.08,76.461 105.08,76.787 105.664,77.372 105.664,77.849 105.409,78.104 R28.2@105.307,78.104
HDMI_TX0_N: CN1.9 D2.4 D2.7 R27.1 | length 51.3
  Top Layer 1 w0.109: R27.1@104.432,77.891 104.311,77.891 104.224,77.804 103.516,77.804 103.404,77.916 102.892,77.916 102.835,77.859 100.988,77.859 100.988,77.867 100.54,78.315 96.995,78.315 96.534,77.854 95.882,77.854 95.673,78.063 95.597,78.139 94.914,78.139 94.838,78.063 92.02,75.245 91.944,75.169 91.944,73.325 91.736,73.117 91.736,64.026 92.143,63.619 92.757,63.619 93.34,63.036 93.34,62.304 93.494,62.151 93.777,61.868 93.93,61.714 94.796,61.714 95.033,61.477 95.033,60.553 95.319,60.267 95.396,60.19 96.031,60.19 96.393,59.828 96.393,59.348 96.546,59.194 96.619,59.121 96.772,58.968 104.464,58.968 105.91,57.522 105.91,57.506 106.064,57.353 107.967,55.449 107.967,55.103 107.879,55.015 D2.7@107.879,54.407 D2.4@107.879,53.541 107.879,52.752 107.429,52.302 CN1.9@107.429,50.948
HDMI_TX0_P: CN1.7 D2.5 D2.6 R26.1 | length 51.1
  Top Layer 1 w0.109: R26.1@103.857,77.346 103.857,77.383 103.698,77.542 103.407,77.542 103.296,77.654 103.001,77.654 102.944,77.597 100.879,77.597 100.726,77.75 100.726,77.759 100.431,78.054 97.104,78.054 96.643,77.593 95.773,77.593 95.769,77.597 95.488,77.878 95.023,77.878 92.205,75.06 92.205,73.216 91.998,73.009 91.998,72.263 92.202,72.059 92.202,71.869 91.998,71.665 91.998,71.247 92.202,71.043 92.202,70.612 91.998,70.408 91.998,69.8 92.202,69.596 92.202,69.088 91.998,68.884 91.998,64.134 92.251,63.881 92.866,63.881 93.602,63.145 93.602,62.412 94.038,61.976 94.904,61.976 95.295,61.586 95.295,60.661 95.504,60.452 96.139,60.452 96.655,59.936 96.655,59.456 96.881,59.23 100.315,59.23 100.32,59.225 101.345,59.225 101.35,59.23 104.573,59.23 105.002,58.801 105.259,58.801 105.537,58.523 105.537,58.266 105.714,58.089 105.995,58.089 106.172,57.912 106.172,57.614 108.228,55.558 108.228,55.06 108.378,54.91 D2.6@108.378,54.407 D2.5@108.378,53.541 108.378,52.353 108.429,52.302 CN1.7@108.429,50.948
HDMI_TX1_N: CN1.6 D1.1 D1.10 R25.1 | length 51.1
  Top Layer 1 w0.109: 95.009,63.446 94.937,63.374 ccw(c95.233,63.079) 94.937,62.783 95.942,61.779 97.758,59.963 97.911,59.809 98.914,59.809 99.168,60.063 100.211,60.063 100.457,59.817 100.534,59.74 101.131,59.74 101.208,59.817 101.578,60.187 102.627,60.187 103.069,59.745 104.311,59.745 104.579,60.013 105.976,60.013 109.22,56.769 109.22,54.804 109.201,54.786 D1.10@109.201,54.399 D1.1@109.201,53.533 109.201,52.575 108.929,52.302 CN1.6@108.929,50.948 ; 95.01,63.447 ccw(c94.899,63.557) 95.01,63.667 ccw(c94.899,63.557) 94.789,63.667 94.678,63.557 94.672,63.557 cw(c94.421,63.891) 94.127,64.187 94.197,64.258 ccw(c94.087,64.369) 94.198,64.479 ccw(c94.087,64.369) 93.977,64.479 93.905,64.407 cw(c93.609,64.702) 93.314,64.407 93.183,64.538 92.899,64.822 92.745,64.976 92.745,67.329 92.899,67.483 93.367,67.951 93.367,68.734 92.899,69.202 92.745,69.356 92.745,69.788 92.899,69.941 93.356,70.399 93.356,70.972 92.931,71.397 92.778,71.55 92.778,72.248 92.855,72.325 93.06,72.53 93.348,72.818 93.348,73.342 92.851,73.839 92.851,74.687 95.138,76.975 97.777,76.975 97.854,76.898 98.05,76.702 98.812,76.702 98.84,76.731 100.424,76.731 100.585,76.892 102.814,76.892 102.972,76.734 103.062,76.734 103.132,76.803 R25.1@103.269,76.803
HDMI_TX1_P: CN1.4 D1.2 D1.9 R24.1 | length 51.1
  Top Layer 1 w0.109: 94.311,63.78 ccw(c94.421,63.891) 94.531,63.78 ; 94.31,63.78 cw(c94.421,63.891) 94.311,64.001 94.421,64.112 94.421,64.117 ccw(c94.087,64.369) 94.383,64.664 ccw(c94.087,64.369) 93.792,64.664 93.72,64.592 cw(c93.609,64.702) 93.499,64.592 93.368,64.723 93.007,65.084 93.007,67.221 93.628,67.842 93.628,68.843 93.007,69.464 93.007,69.68 93.618,70.29 93.618,71.081 93.04,71.659 93.04,72.14 93.61,72.71 93.61,73.451 93.113,73.948 93.113,74.579 95.247,76.713 97.669,76.713 97.865,76.517 97.941,76.441 98.92,76.441 98.948,76.469 100.532,76.469 100.693,76.63 102.705,76.63 102.786,76.549 102.786,76.459 102.717,76.39 R24.1@102.717,76.253 ; 94.532,63.781 94.604,63.852 cw(c94.899,63.557) 95.195,63.852 cw(c94.899,63.557) 95.233,63.306 95.233,63.3 95.122,63.189 ccw(c95.233,63.079) 95.122,62.968 96.127,61.964 96.152,61.989 96.366,61.989 96.52,61.835 96.52,61.595 96.647,61.468 96.931,61.468 97.155,61.244 97.155,61 97.219,60.936 97.56,60.936 97.79,60.706 97.79,60.301 98.02,60.071 98.806,60.071 99.06,60.325 100.319,60.325 100.642,60.002 101.023,60.002 101.469,60.448 102.736,60.448 103.182,60.002 104.198,60.002 104.394,60.198 104.471,60.275 106.084,60.275 106.611,59.748 109.482,56.877 109.482,55.006 109.702,54.786 D1.9@109.702,54.399 D1.2@109.702,53.533 109.702,52.53 109.929,52.302 CN1.4@109.929,50.948
HDMI_TX2_N: CN1.3 D1.4 D1.7 R23.1 | length 51.6
  Top Layer 1 w0.109: 95.944,65.076 95.757,64.889 ccw(c96.051,64.592) 96.303,64.258 96.308,64.258 96.535,64.485 cw(c96.646,64.375) 96.756,64.485 cw(c96.646,64.375) 96.756,64.264 ; 95.944,65.076 ccw(c95.834,65.187) 95.944,65.297 ccw(c95.834,65.187) 95.723,65.297 95.651,65.225 cw(c95.356,65.52) 95.06,65.225 94.929,65.356 94.353,65.932 94.353,74.387 95.767,75.8 95.92,75.954 97.699,75.954 97.728,75.925 99.133,75.925 99.162,75.954 101.406,75.954 101.715,75.645 R23.1@102.121,75.645 ; 96.755,64.264 96.569,64.077 ccw(c96.863,63.78) 96.568,63.485 ccw(c96.863,63.78) 97.114,63.447 97.12,63.447 97.347,63.673 cw(c97.457,63.563) 97.568,63.673 cw(c97.457,63.563) 97.568,63.452 ; 97.567,63.452 97.38,63.265 ccw(c97.675,62.969) 97.926,62.635 97.932,62.635 98.159,62.862 cw(c98.269,62.751) 98.38,62.862 cw(c98.269,62.751) 98.38,62.641 98.307,62.568 ccw(c98.603,62.273) 98.307,61.978 98.875,61.41 99.206,61.079 107.45,61.079 107.585,60.944 107.678,60.851 107.923,60.606 cw(c107.813,60.495) 107.923,60.385 107.851,60.312 ccw(c108.147,60.017) 107.851,59.722 ccw(c108.147,60.017) 108.398,59.683 108.404,59.683 108.655,59.934 cw(c108.765,59.824) 108.876,59.934 cw(c108.765,59.824) 108.876,59.713 ; 108.875,59.713 108.663,59.501 ccw(c108.958,59.205) 108.663,58.91 ccw(c108.958,59.205) 109.21,58.871 109.216,58.871 109.467,59.123 cw(c109.577,59.012) 109.688,59.123 cw(c109.577,59.012) 109.688,58.901 109.475,58.689 ccw(c109.77,58.393) 109.475,58.098 ccw(c109.77,58.393) 110.022,58.06 110.027,58.06 110.138,58.17 cw(c110.248,58.06) 110.359,58.17 110.397,58.132 110.49,58.039 110.744,57.785 110.744,54.828 110.702,54.786 D1.7@110.702,54.399 D1.4@110.702,53.533 110.702,52.575 110.429,52.302 CN1.3@110.429,50.948
HDMI_TX2_P: CN1.1 D1.5 D1.6 R22-R29.1 | length 50.9
  Top Layer 1 w0.109: 96.162,64.482 cw(c96.051,64.592) 95.941,64.482 cw(c96.051,64.592) 95.941,64.703 96.168,64.929 96.168,64.935 ccw(c95.834,65.187) 96.129,65.482 ccw(c95.834,65.187) 95.538,65.482 95.466,65.41 cw(c95.356,65.52) 95.245,65.41 95.114,65.541 94.615,66.04 94.615,74.279 96.028,75.692 101.219,75.692 101.553,75.358 101.553,75.241 101.56,75.233 101.553,75.226 R22-R29.1@101.553,75.089 ; 96.162,64.482 96.35,64.67 cw(c96.646,64.375) 96.941,64.67 cw(c96.646,64.375) 96.979,64.123 96.979,64.118 96.753,63.891 ccw(c96.863,63.78) 96.753,63.67 ccw(c96.863,63.78) 96.974,63.67 ; 96.974,63.671 97.162,63.858 cw(c97.457,63.563) 97.753,63.858 cw(c97.457,63.563) 97.791,63.312 97.791,63.306 97.564,63.079 ccw(c97.675,62.969) 97.564,62.858 ; 97.565,62.858 ccw(c97.675,62.969) 97.785,62.858 ; 97.786,62.859 97.974,63.047 cw(c98.269,62.751) 98.565,63.047 cw(c98.269,62.751) 98.603,62.5 98.603,62.494 98.492,62.383 ccw(c98.603,62.273) 98.492,62.163 99.06,61.595 99.314,61.341 107.558,61.341 107.77,61.129 107.863,61.036 108.108,60.791 cw(c107.813,60.495) 108.109,60.201 108.036,60.127 ccw(c108.147,60.017) 108.036,59.907 ccw(c108.147,60.017) 108.257,59.907 ; 108.258,59.907 108.471,60.12 cw(c108.765,59.824) 109.061,60.119 cw(c108.765,59.824) 109.099,59.573 109.099,59.567 108.848,59.316 ccw(c108.958,59.205) 108.848,59.095 ccw(c108.958,59.205) 109.069,59.095 ; 109.07,59.096 109.283,59.309 cw(c109.577,59.012) 109.873,59.308 cw(c109.577,59.012) 109.911,58.761 109.911,58.755 109.66,58.504 ccw(c109.77,58.393) 109.66,58.283 ccw(c109.77,58.393) 109.881,58.283 ; 109.882,58.284 109.954,58.356 cw(c110.248,58.06) 110.544,58.355 110.582,58.317 110.675,58.224 111.006,57.893 111.006,54.95 111.201,54.754 D1.6@111.201,54.399 D1.5@111.201,53.533 111.201,52.53 111.429,52.302 CN1.1@111.429,50.948
HDMI_TX_CEC_PORT: CN1.13 D6.1 Q1.3 R16.1 | length 15.5
  Top Layer 1 w0.102: R16.1@96.849,53.824 96.901,53.877 96.901,55.88 97.246,56.225 Q1.3@99.736,56.225 104.036,56.225 104.787,55.474 104.787,53.783 104.976,53.594 105.425,53.594 105.429,53.59 CN1.13@105.429,50.948
HDMI_TX_HPD_PORT: CN1.19 D3.1 R14.2 R15.1 | length 42.2
  Top Layer 1 w0.102: D3.1@101.492,53.608 101.492,53.194 101.6,53.086 101.981,53.086 102.429,52.638 CN1.19@102.429,50.948 102.362,50.881 102.362,48.43 102.641,48.151 111.243,48.151 112.141,49.048 112.141,58.039 107.95,62.23 101.6,62.23 101.346,62.484 101.346,64.516 101.666,64.836 R14.2@102.551,64.836 102.545,64.842 R15.1@102.545,65.996
HDMI_TX_HPDIN: C54.2 R15.2 U2.1V17 | length 14.1
  SIG w0.102: v1(102.373,66.893) 100.455,68.812 100.455,73.266 102.723,75.535 105.859,75.535 106.009,75.385 106.009,75.333 106.215,75.127 v1(106.215,75.046)
HDMI_TXC_N: CN1.12 D2.1 D2.10 R29.1 | length 52.1
  Top Layer 1 w0.109: R29.1@105.538,79.053 105.133,79.053 104.983,79.202 104.907,79.279 94.8,79.279 90.809,75.287 90.809,63.353 93.972,60.189 93.972,60.165 95.979,58.158 103.894,58.158 106.426,55.626 106.426,54.841 106.378,54.794 D2.10@106.378,54.407 D2.1@106.378,53.541 106.378,52.752 105.929,52.302 CN1.12@105.929,50.948
HDMI_TXC_P: CN1.10 D2.2 D2.9 R28.1 | length 52
  Top Layer 1 w0.109: R28.1@104.965,78.446 104.965,78.851 104.798,79.017 94.909,79.017 91.059,75.168 91.059,63.473 91.286,63.246 91.567,63.246 91.821,62.992 91.821,62.711 92.048,62.484 92.329,62.484 92.583,62.23 92.583,61.976 92.837,61.722 93.091,61.722 93.345,61.468 93.345,61.187 93.699,60.833 93.853,60.833 94.234,60.452 94.234,60.273 96.087,58.42 104.002,58.42 104.079,58.343 106.688,55.734 106.688,54.985 106.879,54.794 D2.9@106.879,54.407 D2.2@106.879,53.541 106.879,52.353 106.929,52.302 CN1.10@106.929,50.948
HDMI_TXDDC_SCL_PORT: CN1.15 D5.1 Q2.3 R18.2 | length 11.5
  Top Layer 1 w0.102: D5.1@104.11,53.6 104.11,52.989 104.429,52.67 CN1.15@104.429,50.948 104.472,50.905 104.472,49.545 v1(104.515,49.501)
  Bottom Layer 1 w0.102: R18.2@102.593,53.42 102.64,53.467 103.886,53.467 104.551,52.802 Q2.3@105.713,52.802 105.713,50.699 v1(104.515,49.501)
HDMI_TXDDC_SDA_PORT: CN1.16 D4.1 Q3.3 R20.2 | length 17.8
  Top Layer 1 w0.102: D4.1@102.801,53.607 102.801,53.155 102.997,52.959 103.579,52.959 103.929,52.609 CN1.16@103.929,50.948 103.953,50.924 103.953,49.327 v1(103.977,49.303)
  Bottom Layer 1 w0.102: R20.2@102.597,54.303 102.651,54.356 103.759,54.356 104.919,55.516 Q3.3@105.696,55.516 ; v1(103.977,49.303) 104.006,49.274 104.218,49.274 104.343,49.149 105.791,49.149 106.68,50.038 106.68,53.654 105.691,54.644 Q3.3@105.691,55.511
HDMITX_CEC_M0: Q1.2 R16.2 R17.1 U2.1V5 | length 108.1
  Top Layer 1 w0.102: R17.1@98.751,53.821 98.748,53.824 R16.2@97.714,53.824 97.755,53.865 Q1.2@97.755,55.275 97.785,55.245 102.118,55.245 102.262,55.1 v1(102.262,55.076)
  SIG w0.102: v1(102.262,55.076) 102.304,55.118 102.615,55.118 102.666,55.169 137.846,55.169 141.097,58.42 141.097,83.947 139.65,85.394 112.318,85.394 110.841,83.917 110.841,82.39 111.861,81.369 111.861,80.555 v1(111.888,80.528)
HDMITX_SCL: Q2.2 R19.1 U2.AR12 | length 100.6
  Top Layer 1 w0.102: v1(110.089,81.997) 110.089,81.917 110.374,81.633 110.374,81.238 U2.AR12@110.553,81.059
  SIG w0.102: v1(110.089,81.997) 110.045,82.041 110.045,84.385 111.898,86.237 140.07,86.237 141.729,84.579 141.729,57.788 138.177,54.236 v1(113.36,54.236)
  Bottom Layer 1 w0.102: Q2.2@107.693,51.852 109.477,51.852 R19.1@109.487,51.862 109.532,51.816 110.49,51.816 111.379,52.705 112.776,52.705 113.36,53.289 v1(113.36,54.236)